# Altium PCB MotorBoard.PcbDoc (part 2 of 2)
Units mm, origin at the board's own origin, x right, y up, seen from the top; angles counter-clockwise.
Board outline 65.2 x 61.84 mm, 4 copper layers (Top Layer, Layer 1, Layer 2, Bottom Layer), stack 1.57 mm thick; 110 components, 72 nets, 437 pads, 238 vias.
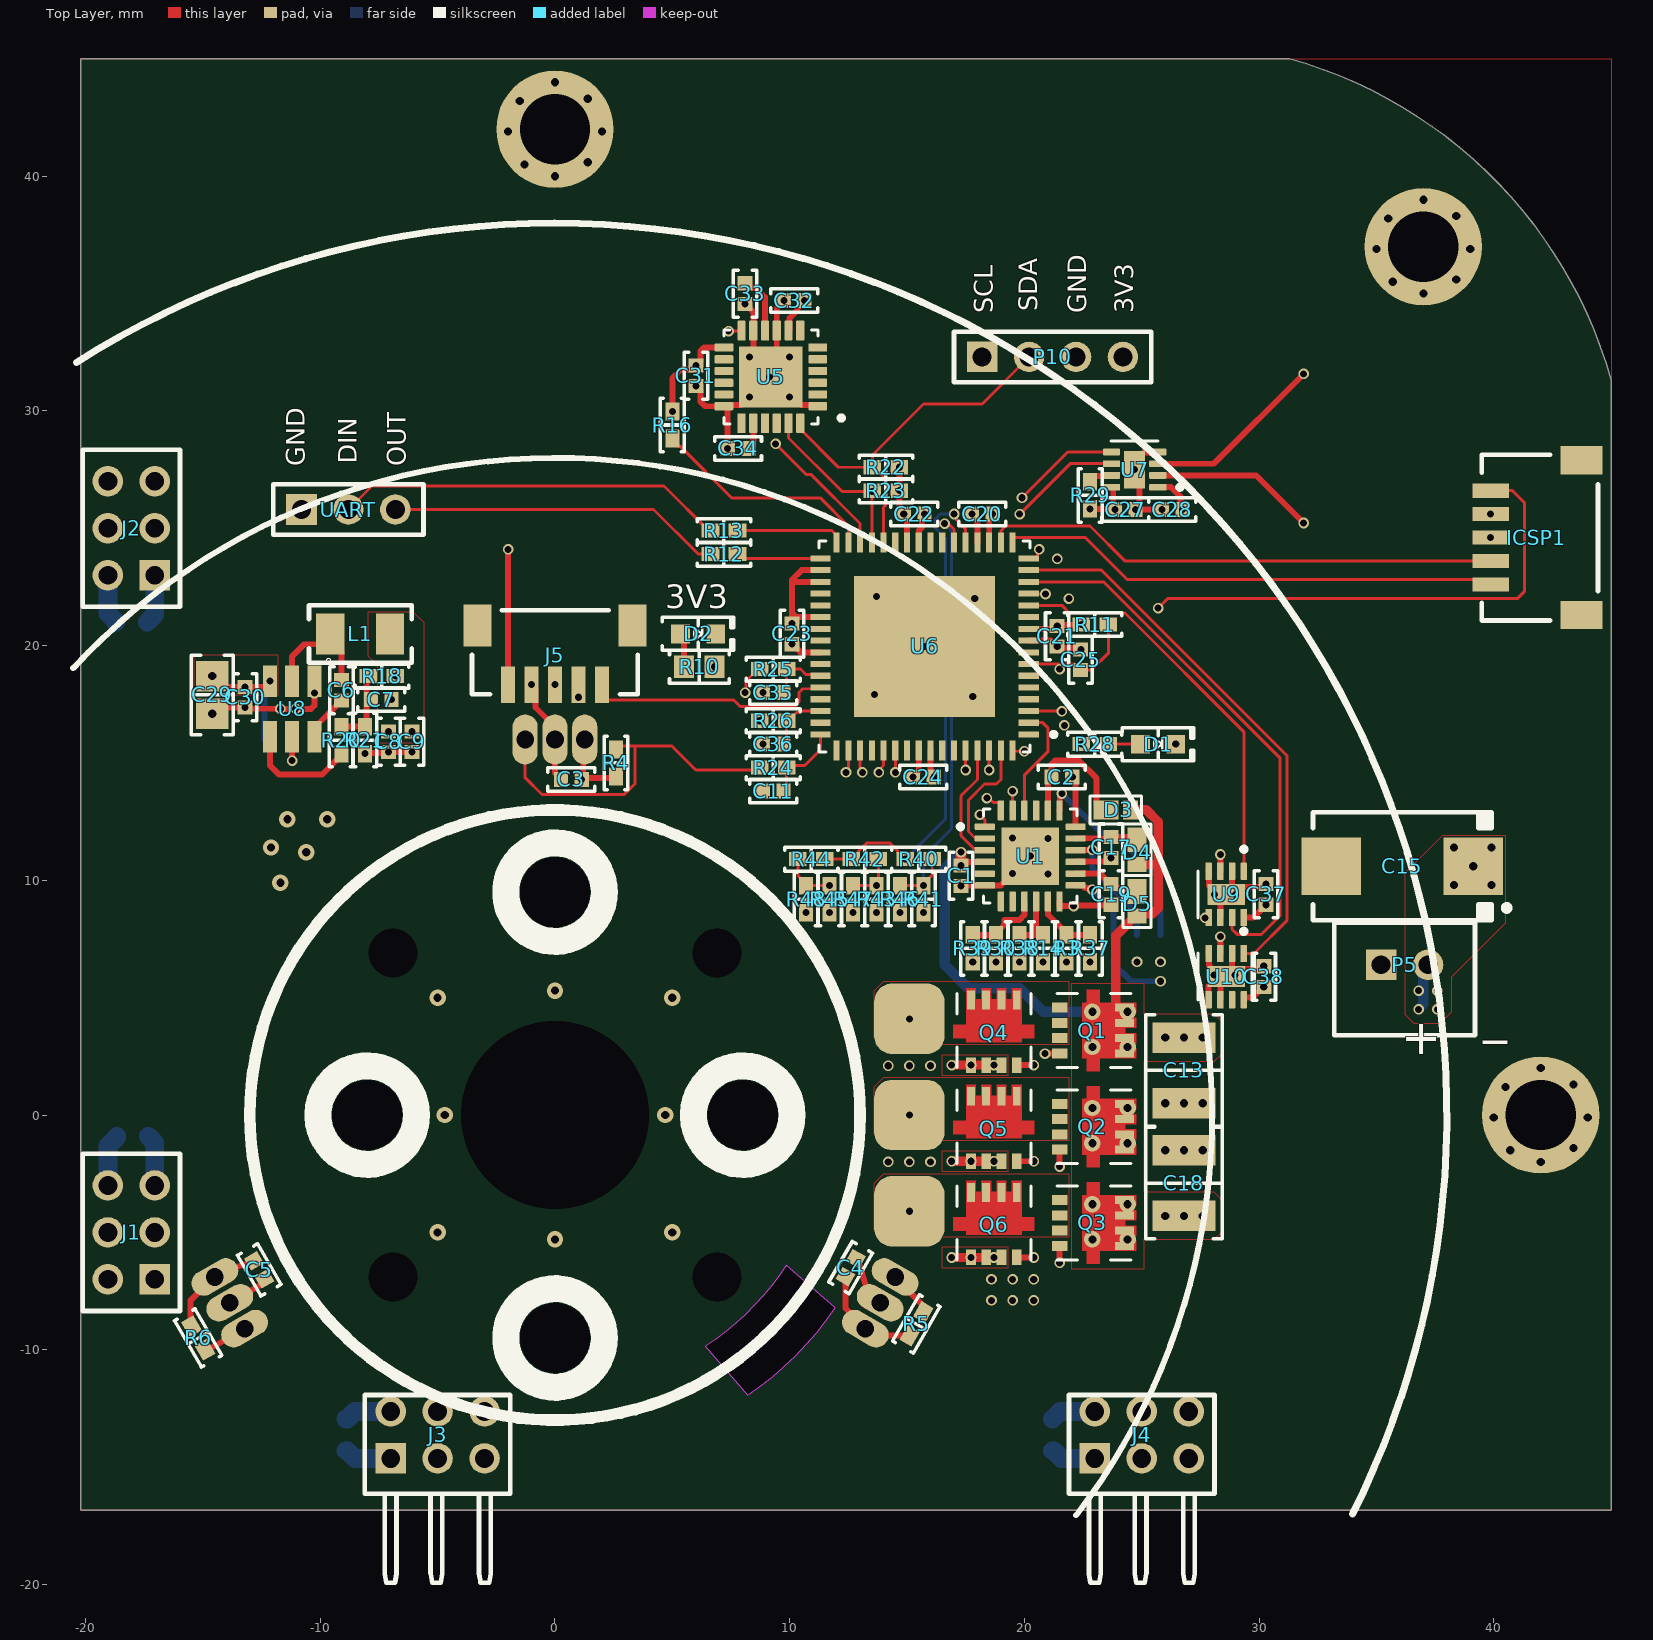
[diagram p0: Top Layer view]

## Via types
v1: diameter 0.45, hole 0.3, Top Layer to Bottom Layer, tented both sides, 170 vias
v2: diameter 0.7, hole 0.35, Top Layer to Bottom Layer, tented both sides, 44 vias
v3: diameter 0.7, hole 0.35, Top Layer to Bottom Layer, tented bottom, 24 vias

## Nets (pads, with @x,y where several pads share a name; then routed paths per layer and width w, separated by ;. In a path a pad name is that pad's centre, name@x,y a point inside that pad or via, vN(x,y) a via of type N, cw(c..) or ccw(c..) an arc to the next point about the centre after c; other vN are vias at no path point) (continued)
MCLR: (continued)
  Layer 2 w0.127: v1(21.5,19) 22.8,19 25.383,21.583 25.683,21.583 v1(25.7,21.6)
NetD1_1: D1.1 R28.2 | length 1.4
  Top Layer w0.127: R28.2 D1.1
NetD2_1: D2.1 R10.2 | length 1.5
  Top Layer w0.254: D2.1 5.5,20.35 R10.2
NetR12_2: R12.2 UART.3 | length 14.2
  Top Layer w0.127: UART.3 4.2,25.8 6.1,23.9 R12.2
NetR13_2: R13.2 UART.2 | length 16.6
  Top Layer w0.127: UART.2 -7.8,26.8 4.65,26.8 6.55,24.9 R13.2
OUT_U: C2.2 pad.2@15.1,4.1 Q1.1 Q1.2 Q1.3 Q4.5 Q4.6 Q4.7 Q4.8 R41.2 U1.18 | length 17
  Top Layer w0.254: v1(22.04,14.4) 22.185,14.255 U1.18
  Layer 1 w0.254: v1(15.1,4.1) 15.1,6.3 15.7,6.9 v1(15.7,8.625) 17.225,8.625 18.3,9.7 18.3,11.9 19.3,12.9 19.7,12.9 21.2,14.4 v1(22.04,14.4)
OUT_V: C17.2 pad.2@15.1,0 Q2.1 Q2.2 Q2.3 Q5.5 Q5.6 Q5.7 Q5.8 R43.2 U1.15 | length 28.7
  Top Layer w0.254: U1.15 22.193,10.793 23.533,10.793 v1(23.7,10.96)
  Layer 1 w0.254: v1(13.7,8.625) 13.7,1.4 v1(15.1,0)
  Layer 2 w0.254: v1(15.1,0) 13.5,1.6 13.5,4.2 19.091,9.791 22.191,9.791 23.355,10.955 23.695,10.955 v1(23.7,10.96)
OUT_W: C19.2 pad.2@15.1,-4.1 Q3.1 Q3.2 Q3.3 Q6.5 Q6.6 Q6.7 Q6.8 R45.2 U1.12 | length 44.6
  Top Layer w0.254: U1.12 21.5,8.908 21.508,8.9 v1(22.1,8.9) 22.13,8.93 23.67,8.93 C19.2
  Layer 1 w0.254: v1(11.7,8.625) 13.2,7.125 13.2,-2.2 v1(15.1,-4.1)
  Layer 2 w0.254: v1(15.1,-4.1) 13,-2 13,4.5 18.7,10.2 20.9,12.4 22.937,12.4 24.179,11.158 24.179,10.202 22.877,8.9 v1(22.1,8.9)
PGC: ICSP1.5 U6.17 | length 21.4
  Top Layer w0.127: U6.17 19.5,24.533 19.567,24.6 22.6,24.6 24.389,22.811 39.657,22.811 ICSP1.5
PGD: ICSP1.4 U6.18 | length 22.2
  Top Layer w0.127: U6.18@19.067,24.466 U6.18 19,24.9 19.2,25.1 22.8,25.1 24.3,23.6 ICSP1.4
PWM_UH: U1.22 U6.2 | length 4.8
  Top Layer w0.127: U1.22 20,14.477 21,15.477 21,16.5 20.785,16.715 U6.2
PWM_UL: U1.1 U6.3 | length 9.8
  Top Layer w0.127: v1(18.1,12.8) 18.1,12.791 18.315,12.576 U1.1 ; U6.3 20.193,17.207 21.593,17.207 v1(21.6,17.2)
  Layer 2 w0.127: v1(18.1,12.8) 18.117,12.817 18.417,12.817 18.9,13.3 19.8,13.3 20.1,13.6 20.1,14.081 19.4,14.781 19.4,16 20.615,17.215 21.585,17.215 v1(21.6,17.2)
PWM_VH: U1.23 U6.62 | length 3.1
  Top Layer w0.127: v1(18.5,14.7) U6.62 ; U1.23 19.435,13.035 19.5,13.101 v1(19.5,13.8)
  Layer 2 w0.127: v1(18.5,14.7) 18.55,14.7 19.45,13.8 v1(19.5,13.8)
PWM_VL: U1.2 U6.63 | length 5.1
  Top Layer w0.127: U1.2 18.3,11.8 17.9,11.8 17.615,12.085 17.615,13.415 18.3,14.1 18.8,14.1 19,14.3 U6.63
PWM_WH: U1.24 U6.60 | length 3.4
  Top Layer w0.127: v1(17.5,14.7) U6.60 ; v1(18.4,13.5) 18.487,13.5 18.674,13.313 18.928,13.313 19,13.241 U1.24
  Layer 2 w0.127: v1(17.5,14.7) 18.338,13.862 18.338,13.562 v1(18.4,13.5)
PWM_WL: U1.3 U6.61 | length 5.2
  Top Layer w0.127: U6.61 18,14.3 17.3,13.6 17.3,11.9 17.843,11.357 18.243,11.357 U1.3
REG_BST: C6.1 U8.6 | length 2
  Top Layer w0.254: U8.6 -10.077,16.288 -10.077,16.683 -9.293,17.467 -9.293,17.487 -9.12,17.66 C6.1
REG_EN: R19.1 U8.5 | length 1.9
  Top Layer w0.254: v1(-11.2,15.1) U8.5
  Bottom Layer w0.254: R19.1 -11.212,15.987 -11.212,15.112 v1(-11.2,15.1)
REG_FB: R20.2 U8.4 | length 4.8
  Top Layer w0.254: U8.4 -12.15,14.899 -11.751,14.5 -9.925,14.5 -9.1,15.325 R20.2
REG_FB_R: C7.1 R18.2 R20.1 R21.1 | length 3.2
  Top Layer w0.254: R20.1 R21.1 -8.025,16.625 -8.025,18.625 R18.2
REG_SW: C6.2 L1.1 U8.2 | length 5.2
  Top Layer w0.254: U8.2 -11.2,19.541 -10.683,20.058 -10.017,20.058 L1.1 -9.575,20.225 -9.1,19.75 C6.2
RX: R13.1 U6.32 | length 4.6
  Top Layer w0.127: R13.1 11.8,24.9 12,24.7 U6.32
SCL: P10.1 R23.2 U5.23 U6.29 | length 15
  Top Layer w0.127: U5.23 9.95,28.85 12.225,26.575 v1(13.5,26.575) ; U6.29 v1(13.5,26.575) ; R23.2 v1(13.5,26.575)
  Layer 2 w0.127: v1(13.5,26.575) 13.5,27.6 P10.1
SDA: P10.2 R22.2 U5.24 U6.28 | length 16.4
  Top Layer w0.127: U5.24 10.45,29.225 12.075,27.6 R22.2 ; U6.28 14,25.893 14.091,25.983 14.091,27.11 13.6,27.6 R22.2 ; P10.2 18.2,30.3 15.7,30.3 13.525,28.125 R22.2
SNS_U: R40.2 R41.1 R46.2 U6.22 | length 19.4
  Top Layer w0.127: R46.2 v1(15.7,9.775) 15.7,9.85 16.075,10.225 R40.2 ; v1(16.6,25.2) 16.662,25.138 16.818,25.138 17,24.956 U6.22
  Bottom Layer w0.127: v1(15.7,9.775) 15.7,11 16.9,12.2 16.9,24.9 v1(16.6,25.2)
SNS_V: R42.2 R43.1 R47.2 U6.16 | length 22
  Top Layer w0.127: R47.2 v1(13.7,9.775) 13.775,9.85 R42.2 ; U6.16 20.485,23.715 20.552,23.781 20.552,23.933 20.631,24.013 v1(20.631,24.1)
  Layer 1 w0.127: v1(13.7,9.775) 13.7,10.6 17.046,13.946 18.846,13.946 19.965,15.065 20.344,15.065 20.928,15.65 20.928,21.528 21.4,22 21.4,22.5 20.631,23.269 v1(20.631,24.1)
SNS_W: R44.2 R45.1 R48.2 U6.13 | length 20.7
  Top Layer w0.127: R44.2 10.35,10.2 10.7,9.85 R48.2 v1(11.7,9.775) ; U6.13 20.193,22.207 20.892,22.207 v1(20.9,22.2)
  Layer 1 w0.127: v1(11.7,9.775) 15.225,13.3 16,13.3 16.9,14.2 18.588,14.2 19.584,15.197 19.584,15.884 20.6,16.9 20.6,21.9 v1(20.9,22.2)
SNS_X: R40.1 R42.1 R44.1 U6.21 | length 21.8
  Top Layer w0.127: R44.1 R42.1 12.7,10.9 12.936,11.137 12.936,11.242 13.295,11.6 14.255,11.6 14.613,11.242 14.613,11.137 14.709,11.041 14.784,11.041 v1(14.925,10.9) ; v1(17.008,25.608) 17.008,25.521 17.106,25.422 17.106,25.351 17.5,24.958 U6.21
  Bottom Layer w0.127: v1(14.925,10.9) 16.646,12.621 16.646,24.566 16.185,25.028 16.185,25.372 16.428,25.615 17.001,25.615 v1(17.008,25.608)
TX: R12.1 U6.33 | length 3.6
  Top Layer w0.127: R12.1 7.96,23.715 U6.33
VBAT: C1.2 C10.2 C12.2 C13.2 C14.1 C15.1 C16.1 C18.2 C26.1 C28.1 C29.2 C30.2 D3.2 D4.2 D5.2 J1.2 J1.4 J1.6 J2.2 J2.4 J2.6 J3.1 J3.3 J3.5 J4.1 J4.3 J4.5 J5.1 P5.2 Q1.5 Q1.6 Q1.7 Q1.8 Q2.5 Q2.6 Q2.7 Q2.8 Q3.5 Q3.6 Q3.7 Q3.8 R19.2 U1.4 U7.1 U8.3 | length 111.5
  Top Layer w0.254: v2(-14.6,18.7) -14.14,18.24 v1(-13.2,18.24) -12.323,18.24 -12.15,18.413 v1(-12.15,18.485) ; J5.1 v1(-2,24.1) ; v1(17.3,10.64) 17.445,10.785 U1.4 ; U7.1 26.25,26.75 26.648,26.352 26.648,25.892 v1(26.74,25.8)
  Top Layer w0.4: 23.9,4.121 23.9,7.65 D5.2@24.725,8.475 ; D3.2 25.2,13 25.7,12.5 25.7,10.7 ; D5.2 24.908,8.583 25.466,8.583 25.7,8.817 25.7,10.7 ; D4.2 25.675,10.675 25.7,10.7
  Top Layer w0.45: v1(17.3,10.64) v1(17.3,11.2)
  Layer 1 w0.45: v1(17.3,10.64) v1(17.3,11.2)
  Layer 2 w0.254: v1(-12.15,18.485) -6.535,24.1 v1(-2,24.1)
  Layer 2 w0.4: v1(26.74,25.8) 28.14,27.2 40.5,27.2 41.325,26.375 41.325,11.4
  Layer 2 w0.45: v1(17.3,10.64) v1(17.3,11.2) 17.9,11.2 19.579,12.879 23.421,12.879 27,9.3 27,5.1
  Bottom Layer w0.254: R19.2 -12.375,18.207 -12.15,18.432 v1(-12.15,18.485)
  Bottom Layer w0.45: v2(24.4,4.4) v2(22.9,4.4) 20.8,4.4 19.8,5.4 17.6,5.4 16.6,6.4 16.6,10.5 16.74,10.64 ; C26.1 36.994,4.719 36.994,5.911 37.2,6.117 P5.2 ; 16.74,10.64 v1@17.15,11.05 ; 16.74,10.64 v1(17.3,10.64) 17.3,10.9 ; v1@17.15,11.05 17.3,10.9 ; v1@17.15,11.05 v1(17.3,11.2) 17.3,10.9
  Bottom Layer w0.8: J1.6 -19.05,-1.325 -18.675,-0.95 C10.2@-18.675,-0.9 ; J2.2 -19.05,21.375 -18.725,21.05 C16.1 ; C12.2 -8.85,-14.305 -8.525,-14.63 J3.1 ; C14.1 21.25,-14.305 21.575,-14.63 J4.1
  other v1: 36.8,4.5 37.6,4.5 36.8,5.3 37.6,5.3
  other v2: 22.9,-5.3 24.4,-5.3 26,-4.3 26.8,-4.3 27.6,-4.3 22.9,-3.8 24.4,-3.8 22.9,-1.2 24.4,-1.2 22.9,0.3 24.4,0.3 22.9,2.9 24.4,2.9 26,3.3 26.8,3.3 27.6,3.3 38.3,9.8 39.9,9.8 39.125,10.6 38.3,11.4 39.9,11.4
VSS_U_R: Q4.1 Q4.2 Q4.3 R31.2 U9.3 | length 18.4
  Top Layer w0.254: U9.3 v1(28.35,11.1)
  Top Layer w0.4: v1(16.9,2.13) v1(17.725,2.13) Q4.2 v1(18.7,2.13) Q4.3
  Layer 1 w0.2: v1(18.7,2.13) 18.7,4.7 19.8,5.8 23,5.8 23.3,6.1 23.3,7.2 27.2,11.1 v1(28.35,11.1)
VSS_V_R: Q5.1 Q5.2 Q5.3 R36.2 U9.5 | length 19.5
  Top Layer w0.4: v1(16.9,-1.97) v1(17.725,-1.97) Q5.2 v1(18.7,-1.97) Q5.3
  Layer 1 w0.2: v1(18.7,-1.97) 19.3,-1.37 19.3,4.5 20.173,5.373 23.173,5.373 23.7,5.9 23.7,7 25.1,8.4 v1(27.7,8.4)
VSS_W_R: Q6.1 Q6.2 Q6.3 R8.2 U10.3 | length 24.1
  Top Layer w0.254: U10.3 v1(28.35,7.6)
  Top Layer w0.4: v1(16.9,-6.07) v1(17.725,-6.07) Q6.2 v1(18.7,-6.07) Q6.3
  Layer 1 w0.2: v1(18.7,-6.07) 18.7,-2.9 19.7,-1.9 19.7,4.1 20.6,5 23.4,5 24.1,5.7 24.1,6.7 24.629,7.229 27.929,7.229 v1@28.3,7.6
pads on no net: ICSP1.M J5.M U1.5 U1.7 U1.8 U1.21 U5.2 U5.3 U5.4 U5.5 U5.6 U5.7 U5.14 U5.15 U5.16 U5.17 U5.19 U5.21 U5.22 U6.1 U6.4 U6.5 U6.6 U6.8 U6.11 U6.23 U6.24 U6.27 U6.36 U6.37 U6.39 U6.40 U6.42 U6.45 U6.47 U6.49 U6.52 U6.55 U6.58 U6.59 U10.7

## Polygon pours and split planes (outlines as drawn)
GND on Top Layer "NONET_L02_P-001" (solid, remove dead copper, shelved, pour order 95): -20.2,-16.84 -20.2,45 45,45 45,-16.84
VBAT on Top Layer "PolygonDirect" (solid, shelved, pour order 63): 40.5,11.9 37.8,11.9 36.2,10.3 36.2,4.3 36.6,3.9 37.7,3.9 38.2,4.4 38.2,5.9 40.5,8.2
VBAT on Top Layer "PolygonDirect" (solid, remove dead copper, shelved, pour order 92): -15.4,17.9 -11.8,17.9 -11.8,19.6 -15.4,19.6
VBAT on Top Layer "PolygonDirect" (solid, shelved, pour order 65): 25.1,-5.3 28.1,-5.3 28.4,-5 28.4,-3.6 28.1,-3.3 25.1,-3.3 25.1,2.3 28.1,2.3 28.4,2.6 28.4,4 28.1,4.3 25.1,4.3 25.1,5.6 22,5.6 22,-6.55 25.1,-6.55
3V3 on Top Layer "PolygonDirect" (solid, shelved, pour order 72): -7.95,21.45 -6.05,21.45 -5.6,21 -5.6,16.1 -5.862,15.838 -7.55,15.838 -7.55,19.15 -7.95,19.55
OUT_U on Top Layer "PolygonDirect" (solid, shelved, pour order 83): 13.6,3.3 13.6,5.294 14.006,5.7 21.9,5.7 21.9,3 13.9,3
OUT_W on Top Layer "PolygonDirect" (solid, shelved, pour order 76): 13.6,-4.9 13.6,-2.906 14.006,-2.5 21.9,-2.5 21.9,-5.2 13.9,-5.2
VSS_U_R on Top Layer "NONET_L02_P-001" (solid, shelved, pour order 75): 16.496,1.679 16.496,2.579 19.296,2.579 19.296,1.679
VSS_V_R on Top Layer "NONET_L02_P-001" (solid, shelved, pour order 74): 16.496,-2.421 16.496,-1.521 19.296,-1.521 19.296,-2.421
VSS_W_R on Top Layer "NONET_L02_P-001" (solid, shelved, pour order 73): 16.496,-6.521 16.496,-5.621 19.296,-5.621 19.296,-6.521
OUT_V on Top Layer "PolygonDirect" (solid, shelved, pour order 78): 13.6,-0.8 13.6,1.194 14.006,1.6 21.9,1.6 21.9,-1.1 13.9,-1.1
GND on Bottom Layer "NONET_L02_P-001" (solid, remove dead copper, shelved, pour order 94): -20.2,-16.84 -20.2,45 45,45 45,-16.84
VBAT on Bottom Layer "Bottom Layer-No Net" (solid, shelved, pour order 38): -20.3,-11.2 -20.3,-16.84 45,-16.84 45,12.1 38.1,12.1 36.4,10.4 36.4,5.3 35.25,4.15 35.25,-5.35 31.1,-9.5 -14.4,-9.5 -14.4,17.7 -11.6,17.7 -11.6,19.7 -14.4,19.7 -14.4,28.5 -20.3,28.5
VSS_U_R on Bottom Layer "PolygonDirect" (solid, shelved, pour order 82): 16.5,1.9 16.5,3.7 17.1,4.3 18.4,4.3 18.5,4.2 18.5,2.9 19,2.4 19,1.9 18.8,1.7 16.7,1.7
VSS_V_R on Bottom Layer "PolygonDirect" (solid, shelved, pour order 80): 16.5,-2.2 16.5,-0.4 17.1,0.2 18.4,0.2 18.5,0.1 18.5,-1.2 19,-1.7 19,-2.2 18.8,-2.4 16.7,-2.4
VSS_W_R on Bottom Layer "PolygonDirect" (solid, shelved, pour order 55): 16.5,-6.3 16.5,-4.5 17.1,-3.9 18.4,-3.9 18.5,-4 18.5,-5.3 19,-5.8 19,-6.3 18.8,-6.5 16.7,-6.5
GND on Layer 2 "NONET_L02_P-001" (solid, shelved, pour order 88): -20.2,-16.84 -20.2,45 45,45 45,-16.84
3V3 on Layer 2 "Layer 2-No Net" (solid, shelved, pour order 84): 10.4,-7.4 12.946,-9.946 14.954,-9.946 16.2,-8.7 16.2,-6.6 13.1,-3.5 13.1,12.5 14.3,13.7 20.8,13.7 22,14.9 22,20.5 25.129,23.629 27.209,23.629 28.68,25.1 40.6,25.1 40.8,25.3 40.8,25.9 40.5,26.2 26.8,26.2 25.6,27.4 25.6,32.9 24.9,33.6 23.6,33.6 22.9,32.9 22.9,28.7 21.3,27.1 11.8,27.1 10.8,26.1 8.4,23.7 -6.3,23.7 -12.8,17.2 -12.8,-4.4 -14.4,-6 -14.4,-10 -13.8,-10.6 -11.9,-10.6 -10.5,-9.2 -10.5,13.4 -8,15.9 4.1,15.9 6.6,18.4 9.3,18.4 10.4,17.3 10.4,14.6
VBAT on Layer 2 "Layer 2-VBAT" (solid, shelved, pour order 66): -20.2,-16.84 45,-16.84 45,12.1 38.3,12.1 36.8,10.6 36.8,8 34.4,5.6 22,5.6 22,-7.9 19,-10.9 -14.9,-10.9 -14.9,17.5 -12.7,17.5 -11.731,18.469 -11.731,19.6 -14.9,19.6 -14.9,28.6 -20.2,28.6
no net on Board Outline "NONET_L03_P-001" (none, shelved): -9.854,6.4 -11.95,8.213 cw(c0,0) -8.213,11.95 -6.4,9.854 ccw(c0,0)
GND on Layer 1 "NONET_L02_P-001" (solid, shelved, pour order 89): -20.2,-16.84 -20.2,45 45,45 45,-16.84

## Silkscreen, mask and mechanical layers (free items; w line width, h text height)
Top Overlay:
  circle w1.15: c-8,0 r2.1
  circle w0.5: c0,0 r13
  circle w1.15: c0,-9.5 r2.1
  circle w1.15: c8,0 r2.1
  circle w1.15: c0,9.5 r2.1
  lines w0.254: -20.532,19.037 cw(c0,0) 22.208,-17.053
  lines w0.3: -20.382,32.071 cw(c0,0) 33.988,-16.994
  text "SDA" at 20.547,34.253 h0.8 r90
  text "SCL" at 18.647,34.153 h0.8 r90
  text "GND" at 22.647,34.153 h0.8 r90
  text "3V3" at 24.647,34.153 h0.8 r90
  text "DIN" at -8.453,27.753 h0.8 r90
  text "GND" at -10.653,27.653 h0.8 r90
  text "OUT" at -6.353,27.653 h0.8 r90
  text "3V3" at 4.7,21.6 h1
  text "_" at 39.55,3.5 h1.5
  text "+" at 36.05,2.6 h1.5
Bottom Overlay:
  circle w0.5: c0,0 r13
  lines w0.3: -20.387,19.193 cw(c0,0) 22.231,-17.023 ; -20.356,32.088 cw(c0,0) 33.968,-17.034
Board Outline:
  lines w0.2: -20.2,-16.84 -20.2,45 31.311,45 cw(c26,26) 45,31.311 45,-16.84 -20.2,-16.84 ; 6.4,-9.854 ccw(c0,0) 9.854,-6.4 11.95,-8.213 cw(c0,0) 8.213,-11.95 6.4,-9.854

## Dimensions
-20.2,-16.84 to 45,-16.84 on Dimensions
-20.2,45 to -20.2,-16.84 on Dimensions